# EAGLE board BREAKOUT_SOC8 (EAGLE 9.5.2)
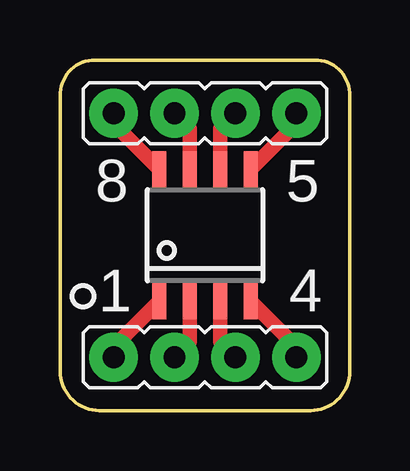
[diagram p0: board, top side]

Size 12.08 x 14.61 mm. Coordinates in mm from the lower left corner, seen from the top.
Outline: 0.01,1.64 0.01,12.97 arc-90 1.33,14.6 10.76,14.6 arc-90 12.07,12.97 12.07,1.64 arc-90 10.44,0 1.64,0 arc-90 0.01,1.64
Copper layers (1*16): Top 0.035mm / dielectric 1.5mm / Bottom 0.035mm
Design rules "default": minimum track width 6mil, minimum drill 0.35mm, track to track 6mil, track to pad 6mil, pad to pad 6mil, via to via 6mil, smd to smd 6mil, copper to edge 40mil, drill to drill 6mil, minimum pad ring 10mil, minimum via ring 8mil, stop-mask expansion 4mil, vias tented up to drill 0mil, thermal gap 10mil

## Footprints (pad centres in the part's own frame; a part is rotated, then mirrored left to right if it is on the bottom)
SOIC8 = smd 0.6 x 1.5: 1 -1.905,-2.75; 2 -0.635,-2.75; 3 0.635,-2.75; 4 1.905,-2.75; 5 1.905,2.75; 6 0.635,2.75; 7 -0.635,2.75; 8 -1.905,2.75
JP4 = drill 0.914 pad 2.032: 1 -3.81,0; 2 -1.27,0; 3 1.27,0; 4 3.81,0

## Placement (x,y rotation side)
IC1  OP07SOIC8  [SOIC8]  6.04,7.3 0 top
JP2  [JP4]  6.04,2.22 0 top
JP3  [JP4]  6.04,12.38 180 top

## Library data of the parts
IC1 = OP07_JULIO
JP2 JP3 = jumper-4

## Nets
1: IC1.1 JP2.1
2: IC1.2 JP2.2
3: IC1.3 JP2.3
4: IC1.4 JP2.4
5: IC1.5 JP3.1
6: IC1.6 JP3.2
7: IC1.7 JP3.3
8: IC1.8 JP3.4

## Tracks (layer width: path | path; a pad name or v marks a point on that pad's centre or on a via)
1
  Top 0.6: JP2.1 2.23,2.65 IC1.1
2
  Top 0.6: IC1.2 5.41,2.86 JP2.2
3
  Top 0.6: IC1.3 6.68,2.86 JP2.3
4
  Top 0.6: JP2.4 9.85,2.65 IC1.4
5
  Top 0.6: JP3.1 9.85,11.96 IC1.5
6
  Top 0.6: JP3.2 6.68,11.75 IC1.6
7
  Top 0.6: JP3.3 5.41,11.75 IC1.7
8
  Top 0.6: JP3.4 2.23,11.96 IC1.8

## Text on the board
tPlace: 8 | 5 | 1 | 4